# EAGLE board cpOD-copy (EAGLE 7.7.0)
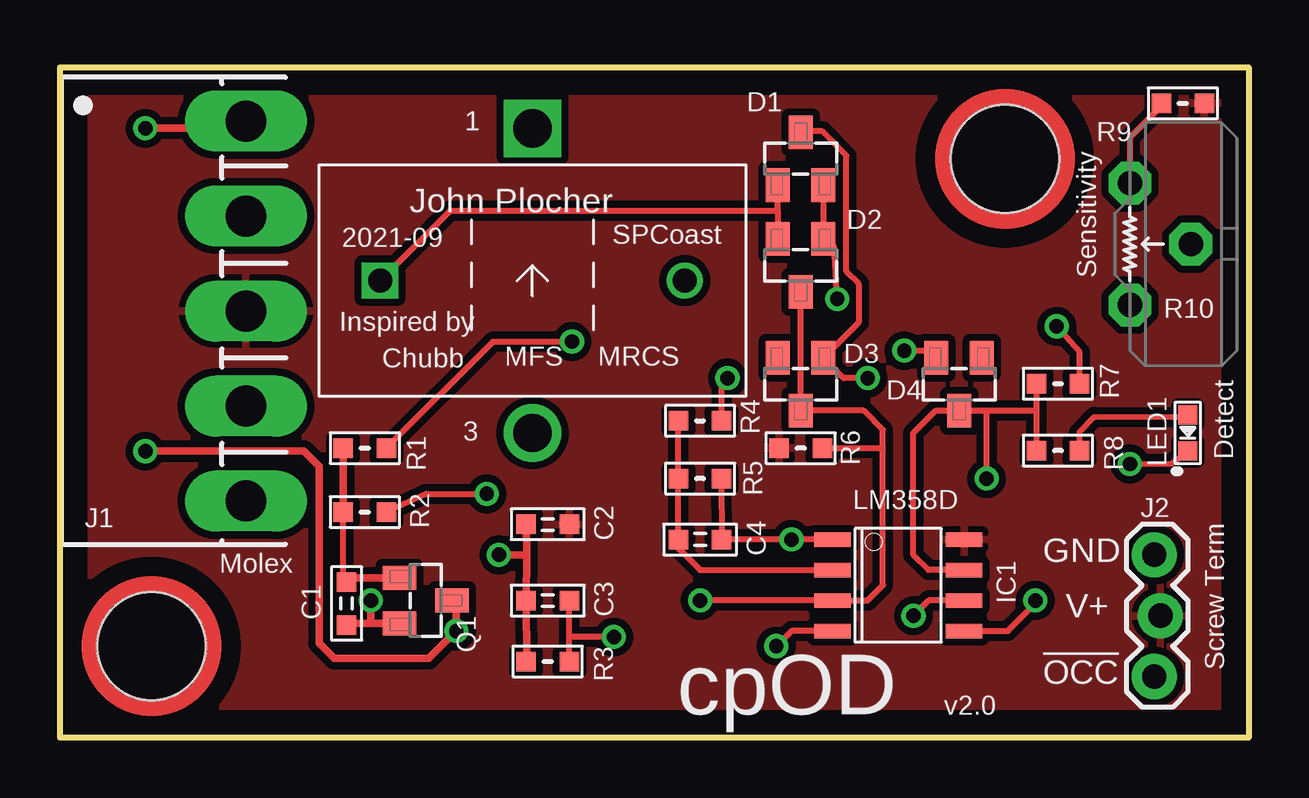
[diagram p0: board, top side]
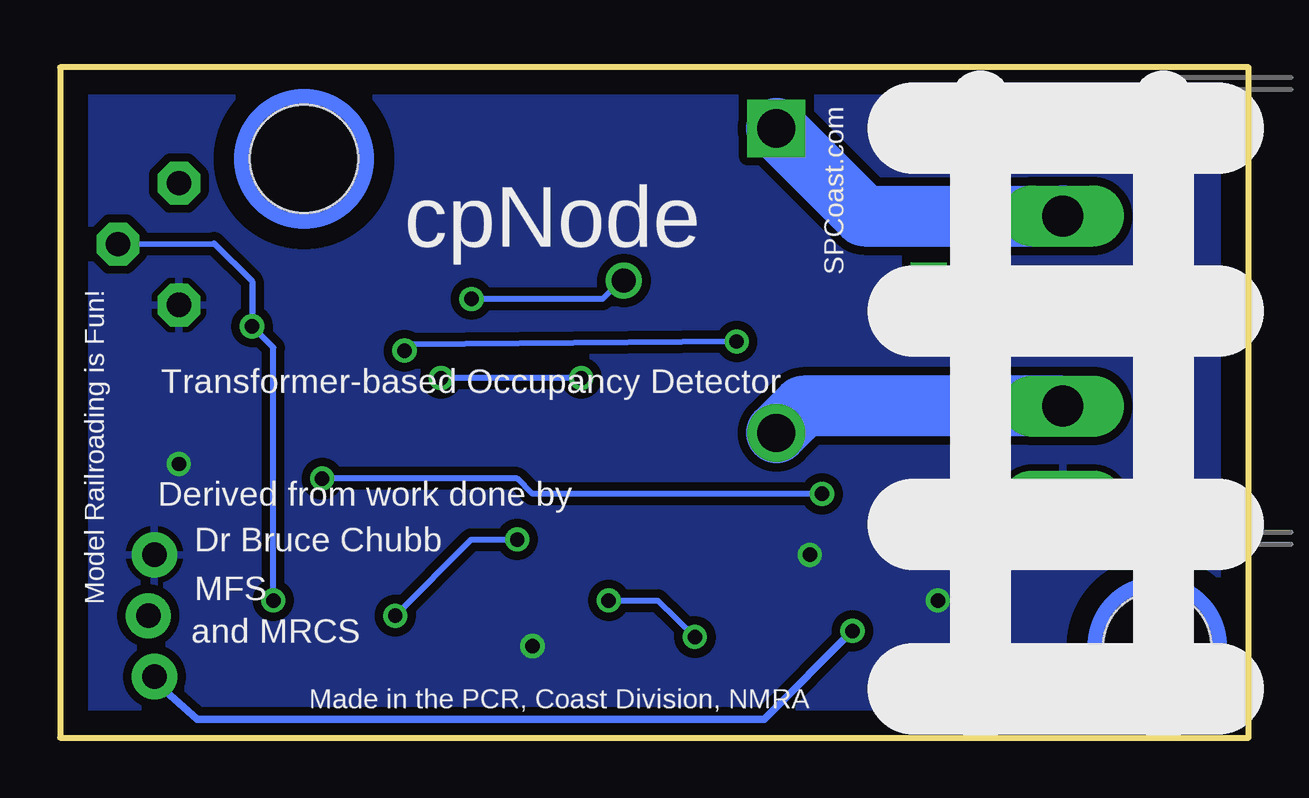
[diagram p1: board, bottom side, seen from below]

Size 49.53 x 27.94 mm. Coordinates in mm from the lower left corner, seen from the top.
Outline: 0,0 0,27.94 49.53,27.94 49.53,0 0,0
Copper layers (1*16): Top 0.035mm / dielectric 1.5mm / Bottom 0.035mm
Design rules "default": minimum track width 10mil, minimum drill 0.6mm, track to track 8mil, track to pad 8mil, pad to pad 8mil, via to via 8mil, smd to smd 8mil, copper to edge 40mil, drill to drill 8mil, minimum pad ring 10mil, minimum via ring 8mil, stop-mask expansion 4mil, vias tented up to drill 0mil, thermal gap 10mil

## Footprints (pad centres in the part's own frame; a part is rotated, then mirrored left to right if it is on the bottom)
0603-CAP = smd 0.813 x 0.813: 1 -0.9,0; 2 0.9,0
SOT23 = smd 1.4 x 1: 1 1.1,-0.95; 2 1.1,0.95; 3 -1.1,0
SO-8 = smd 1.524 x 0.61: 1 -2.743,1.905; 2 -2.743,0.635; 3 -2.743,-0.635; 4 -2.743,-1.905; 5 2.743,-1.905; 6 2.743,-0.635; 7 2.743,0.635; 8 2.743,1.905
KK-156-5 = drill 1.7 pad 2.184 long: 1 -7.92,0; 2 -3.96,0; 3 0,0; 4 3.96,0; 5 7.92,0
1X03 = drill 1.016 pad 1.88: 1 0,-0.127; 2 2.54,0.127; 3 5.08,-0.127
0603-LED = smd 0.8 x 0.8: A 0.75,0; C -0.75,0
0603-RES = smd 0.813 x 0.813: 1 -0.9,0; 2 0.9,0
PT-10S = drill 1.016 pad 1.778 octagon: 1 -2.54,-1.27; 2 2.54,-1.27; 3 0,1.27
MOUNTINGHOLE-L = hole 4.5: 0,0
TH-T4B = drill 1.6 square: P1 0,6.35 | drill 1.6: P2 0,-6.35 | drill 1 square: S1 -6.35,0 | drill 1: S2 6.35,0

## Placement (x,y rotation side)
C1  1uF  [0603-CAP]  11.94,5.59 270 top
C2  0.1uF  [0603-CAP]  20.32,8.89 180 top
C3  0.1uF  [0603-CAP]  20.32,5.71 180 top
C4  0.01uF  [0603-CAP]  26.67,8.26 0 top
D1  BAT54A  [SOT23]  30.86,24.13 270 top
D2  BAT54C  [SOT23]  30.86,19.68 90 top
D3  BAT54C  [SOT23]  30.86,14.73 90 top
D4  BAT54A  [SOT23]  37.47,14.73 90 top
IC1  LM358D  [SO-8]  34.92,6.35 0 top
J1  [KK-156-5]  7.75,17.78 90 top
J2  [1X03]  45.72,7.62 270 top
LED1  Y  [0603-LED]  46.99,12.7 90 top
Q1  2N7002  [SOT23]  15.24,5.71 180 top
R1  10k  [0603-RES]  12.7,12.06 0 top
R2  2.2M  [0603-RES]  12.7,9.4 0 top
R3  10k  [0603-RES]  20.32,3.17 0 top
R4  200R  [0603-RES]  26.67,13.21 0 top
R5  1M  [0603-RES]  26.67,10.79 180 top
R6  10k  [0603-RES]  30.86,12.06 180 top
R7  1M  [0603-RES]  41.58,14.76 0 top
R8  3.3k  [0603-RES]  41.58,11.96 180 top
R9  10k  [0603-RES]  46.79,26.44 0 top
R10  10k  [PT-10S]  45.85,20.57 270 top
U$1  MOUNTINGHOLEL  [MOUNTINGHOLE-L]  3.81,3.81 0 top
U$2  MOUNTINGHOLEL  [MOUNTINGHOLE-L]  39.37,24.13 0 top
X1  [TH-T4B]  19.68,19.05 0 top

## Library data of the parts
C1-C4 D1-D4 IC1 J1 J2 LED1 Q1 R1-R10 U$1 U$2 X1 = SPCoast

## Nets
!VOUT: J1.5 J2.3 Q1.3
DCC-A: J1.2 X1.P2
DCC-B: J1.4 X1.P1
DETECTED: D4.3 IC1.7 R2.2 R7.1 R8.2
FAST-RISE: D4.2 R1.2
GND: C1.2 C2.2 C3.2 IC1.4 J1.1 J2.1 LED1.C Q1.2 R3.1 R10.2
INPUT-A: D1.2 D2.1 X1.S2
INPUT-B: D1.1 D2.2 X1.S1
INPUT-NEGATIVE: D1.3 D3.1 R4.2
N$11: LED1.A R8.1
OCCUPIED: C1.1 Q1.1 R1.1 R2.1
SENS+: R9.1 R10.1
SENSITIVITY: IC1.5 R7.2 R10.3
STAGE1+: C3.1 D2.3 D3.3 IC1.3 R3.2 R6.1
STAGE1-: C4.1 IC1.2 R4.1 R5.2
TRIGGERED: C4.2 IC1.1 IC1.6 R5.1
V+: C2.1 IC1.8 J1.3 J2.2 R6.2 R9.2

## Tracks (layer width: path | path; a pad name or v marks a point on that pad's centre or on a via)
!VOUT  (via drill 0.6)
  Top 0.305: J1.5 6.35,25.4 v3.56,25.4 | v3.56,11.94 10.16,11.94 10.79,11.3 10.79,3.94 11.43,3.3 15.37,3.3 v16.51,4.45 16.51,5.59 Q1.3
  Bottom 0.305: v3.56,25.4 v3.56,11.94 | v16.51,4.45 20.19,0.76 43.81,0.76 44.96,1.78 J2.3
DCC-A
  Bottom 2.54: J1.2 18.57,13.82 X1.P2
DCC-B
  Bottom 2.54: X1.P1 16.02,21.74 J1.4
DETECTED  (via drill 0.6)
  Top 0.254: IC1.7 36.2,6.99 35.56,7.62 35.56,12.7 36.49,13.63 D4.3 38.61,13.63 | R7.1 40.68,13.63 | R2.2 15.24,10.16 v17.78,10.16 | v38.61,10.79 38.61,13.63 | 38.61,13.63 40.68,13.63 | 40.68,13.63 R8.2
  Bottom 0.254: v17.78,10.16 29.84,10.16 30.48,10.79 v38.61,10.79
FAST-RISE  (via drill 0.6)
  Top 0.254: v21.34,16.51 18.05,16.51 R1.2 | v35.18,16.13 36.39,16.13 D4.2
  Bottom 0.254: v21.34,16.51 34.92,16.38 v35.18,16.13
GND  (via drill 0.6)
  Top 0.254: v18.29,7.62 18.41,7.62 | IC1.4 30.48,4.45 v29.84,3.81 | v44.58,11.4 46.34,11.43 LED1.C
  Top 0.305: R3.1 19.45,3.2 C3.2 19.45,7.62 | 19.45,7.62 C2.2 | 18.41,7.62 19.45,7.62 | C1.2 11.76,4.76 12.95,4.76 | 12.95,4.76 Q1.2 | v12.95,5.71 12.95,4.76
  pour Bottom (isolate 0.356): 0,27.56 49.15,27.56 49.15,0.38 0.13,0.38
INPUT-A  (via drill 0.6)
  Top 0.254: D1.2 D2.1 32.26,20.46 v32.38,18.29
  Bottom 0.254: X1.S2 26.16,19.05 26.92,18.29 v32.38,18.29
INPUT-B
  Top 0.254: 29.91,21.97 16.26,21.97 X1.S1 | D1.1 29.91,22.35 29.91,21.97 | 29.91,21.97 D2.2
INPUT-NEGATIVE  (via drill 0.6)
  Top 0.254: D3.1 31.81,15.94 | D1.3 30.9,25.27 31.75,25.27 32.77,24.26 32.77,19.43 33.27,18.92 33.27,17.3 D3.1 | R4.2 27.57,14.74 v27.81,14.99 | v33.66,14.99 32.66,14.99 D3.1
  Bottom 0.254: v27.81,14.99 v33.66,14.99
N$11
  Top 0.254: LED1.A 46.75,13.34 43.1,13.36 42.47,12.72 R8.1
OCCUPIED
  Top 0.254: C1.1 11.8,6.48 R2.1
  Top 0.305: C1.1 11.76,6.67 Q1.1 | R1.1 R2.1
SENS+
  Top 0.254: R9.1 45.89,26.33 44.58,25.02 R10.1 44.58,22.62
SENSITIVITY  (via drill 0.6)
  Top 0.254: IC1.5 39.5,4.45 40.51,5.46 v40.64,5.71 | R7.2 42.48,16.07 v41.53,17.14
  Bottom 0.254: R10.3 43.1,20.6 41.53,19.02 v41.53,17.14 40.64,16.26 v40.64,5.71
STAGE1+  (via drill 0.6)
  Top 0.254: 34.29,12.06 34.29,6.35 33.66,5.71 IC1.3 v26.67,5.71 | 34.29,12.06 34.29,12.83 33.48,13.63 D3.3 D2.3 | R3.2 21.22,4.19 | 21.22,4.19 C3.1 | R6.1 34.29,12.06 | v23.07,4.19 21.22,4.19
  Bottom 0.254: v26.67,5.71 24.64,5.71 v23.07,4.19
STAGE1-
  Top 0.254: IC1.2 26.67,6.99 25.8,7.86 C4.1 R5.2 R4.1
TRIGGERED  (via drill 0.6)
  Top 0.254: R5.1 27.55,10.77 C4.2 v30.48,8.26 IC1.1 | IC1.6 36.2,5.71 v35.56,5.08
  Bottom 0.254: v35.56,5.08 32.38,8.26 v30.48,8.26
V+
  pour Top (isolate 0.305): 0.25,27.56 49.15,27.56 49.15,0.38 0.38,0.38

## Text on the board
tPlace: 1 | Sensitivity | John Plocher | SPCoast | 2021-09 | Inspired by | MFS | MRCS | Chubb | Detect | 3 | LM358D | Screw Term | Molex | GND | V+ | !OCC | cpOD | v2.0
bPlace: cpNode | SPCoast.com | Model Railroading is Fun! | Transformer-based Occupancy Detector | Derived from work done by | Dr Bruce Chubb | MFS | and MRCS | Made in the PCR, Coast Division, NMRA